# Altium PCB PCB1.PcbDoc
Units mm, origin at the board's own origin, x right, y up, seen from the top; angles counter-clockwise.
Board outline 56.39 x 66.29 mm, 2 copper layers (Top Layer, Bottom Layer); 16 components, 6 nets, 100 pads, 0 vias.
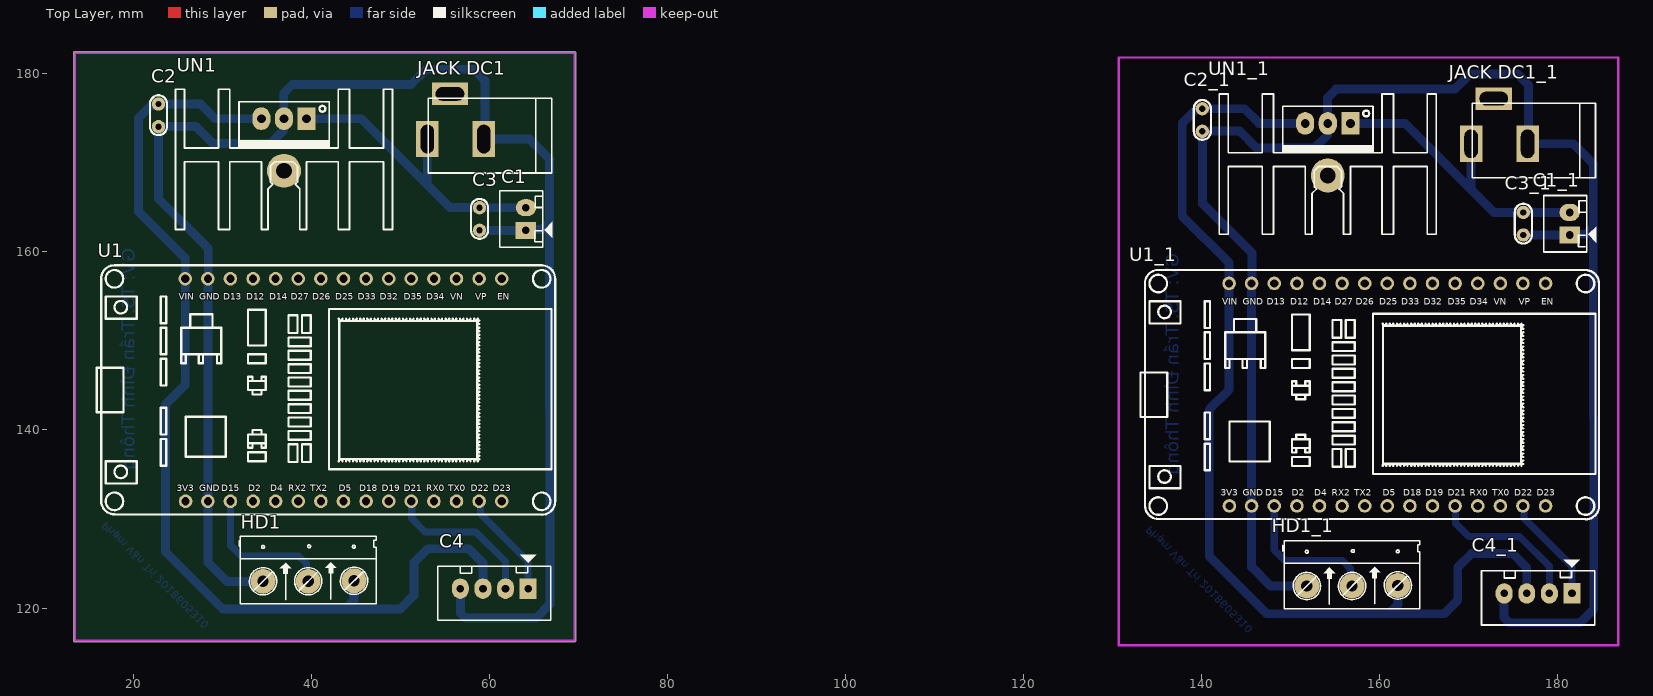
[diagram p0: Top Layer view]
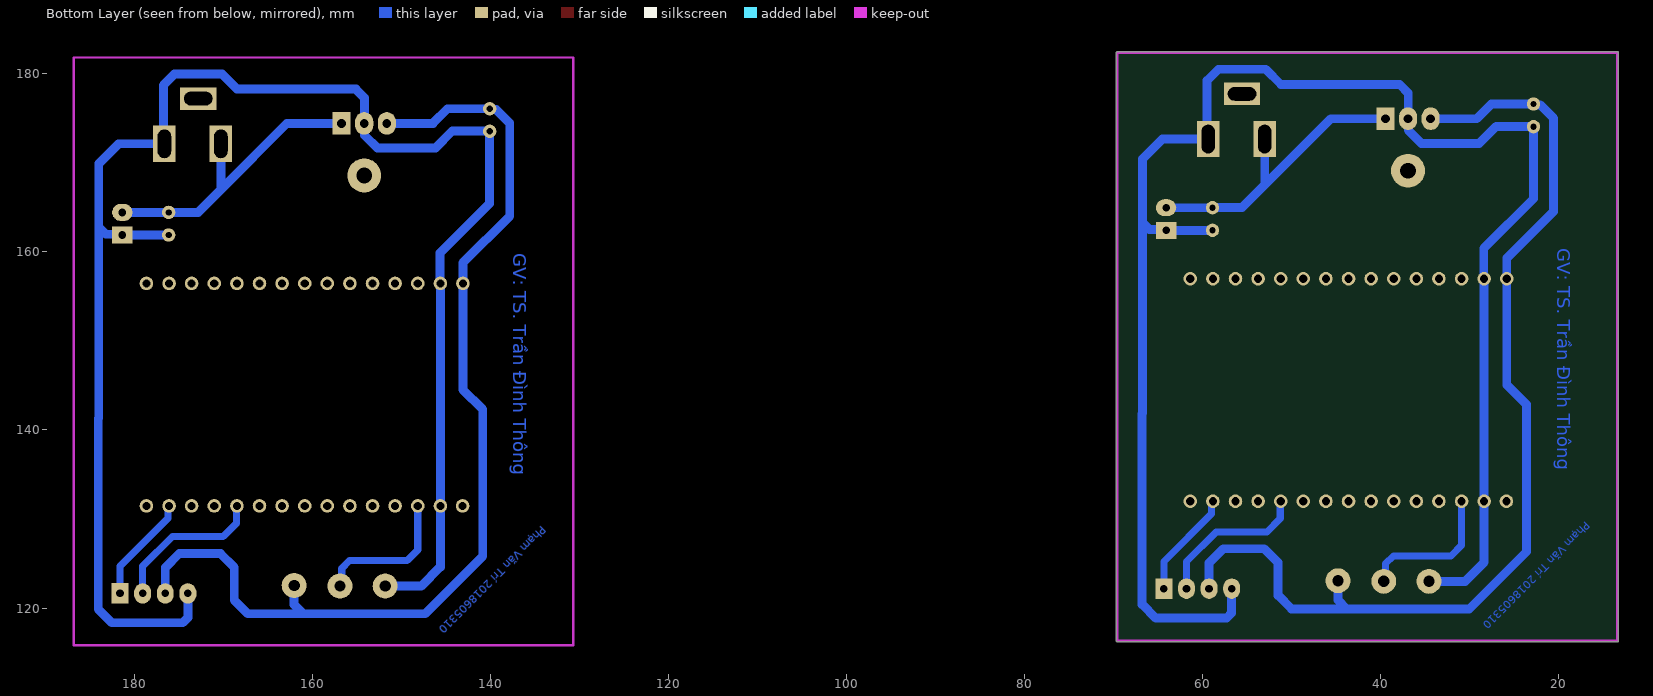
[diagram p1: Bottom Layer view, seen from below]

## Layer stack, top to bottom
Top Solder: solder mask 0.0102, Solder Resist, Dk 3.5
Top Layer: signal copper 0.0356
Dielectric 1: dielectric 0.32, FR-4, Dk 4.8
Bottom Layer: signal copper 0.0356
Bottom Solder: solder mask 0.0102, Solder Resist, Dk 3.5

## Board outline
13.462,116.205 cw(c13.462,116.332) 13.335,116.332 13.335,182.372 cw(c13.462,182.372) 13.462,182.5 69.596,182.5 cw(c69.596,182.372) 69.724,182.372 69.724,116.332 cw(c69.596,116.332) 69.596,116.205

## Design rules (kind name [scope] priority, off if disabled: settings)
Clearance [All] p1: gap=1 ignorepadtopadclearanceinfootprint=FALSE
PolygonConnect [All] p1: connectstyle=Relief reliefconductorwidth=0.254 reliefentries=4 polygonreliefangle="90 Angle" airgapwidth=0.254
RoutingVias [All] p1: holewidth=0.711 width=1.27 viastyle="Through Hole" minholewidth=0.711 minwidth=1.27 maxholewidth=0.711 maxwidth=1.27
SolderMaskExpansion [All] p1: expansion=0.102 istentingtop=FALSE
Width VCC5 [InNet('VCC5')] p1: maxlimit=1 minlimit=1 preferedwidth=1
Width VCC_IN [InNet('VCC_IN')] p2: maxlimit=1 minlimit=1 preferedwidth=1
Width VCC33 [InNet('VCC5')] p3: maxlimit=1 minlimit=1 preferedwidth=1
Width GND [InNet('GND')] p4: maxlimit=1 minlimit=1 preferedwidth=1
Width [All] p5: maxlimit=0.8 minlimit=0.8 preferedwidth=0.8
30 further rules are at their usual default settings.

## Classes and differential pairs
component class Sheet1: C1 C2 C3 C4 HD1 "JACK DC1" U1 UN1

## Components (designator, comment, footprint, x,y, rotation, side; value= is the part's Value field where it differs from the comment)
C1 "Header2" Header2 64.135,162.432 r90 top
C1_1 "Header2" Header2 181.405,161.902 r90 top (schematic designator C1)
C2 "104" "tu gom" 22.86,175.349 r270 top
C2_1 "104" "tu gom" 140.13,174.82 r270 top (schematic designator C2)
C3 "104" "tu gom" 58.928,163.703 r270 top
C3_1 "104" "tu gom" 176.198,163.174 r270 top (schematic designator C3)
C4 "LCD_I2C" Header4 64.389,122.174 r180 top
C4_1 "LCD_I2C" Header4 181.659,121.645 r180 top (schematic designator C4)
HD1 "Header 3" HED3 34.605,122.997 r0 top
HD1_1 "Header 3" HED3 151.874,122.468 r0 top (schematic designator HD1)
"JACK DC1" "JACK DC 5.5" "JACK DC 5.5" 56.236,175.222 r180 top value="Jac DC"
"JACK DC1_1" "JACK DC 5.5" "JACK DC 5.5" 173.506,174.693 r180 top value="Jac DC" (schematic designator "JACK DC1")
U1 "ESP32_MODULE copy" ESP32-WIFIMODULE-FOOTPRINT 41.91,142.367 r270 top
U1_1 "ESP32_MODULE copy" ESP32-WIFIMODULE-FOOTPRINT 159.18,141.838 r270 top (schematic designator U1)
UN1 "L78M05CP" QTO-220H2 36.957,174.968 r180 top
UN1_1 "L78M05CP" QTO-220H2 154.227,174.439 r180 top (schematic designator UN1)

## Footprints (in the part's own frame and the unit in brackets; to place one, negate y for a bottom-side part, rotate by r counter-clockwise, add the part's x,y. Pads: shape width x height; smd on the part's side, far side on the other; paste and mask are expansions set on the pad)
ESP32-WIFIMODULE-FOOTPRINT [mil]
  round 60 hole 36: 1(-575.9,768.25) 2(-575.9,668.25) 3(-575.9,568.25) 4(-575.9,468.25) 5(-575.9,368.25) 6(-575.9,268.25) 7(-575.9,168.25) 8(-575.9,68.25) 9(-575.9,-31.75) 10(-575.9,-131.75) 11(-575.9,-231.75) 12(-575.9,-331.75) 13(-575.9,-431.75) 14(-575.9,-531.75) 15(-575.9,-631.75) 16(408.35,-630.18) 17(408.35,-531.75) 18(408.35,-431.75) 19(408.35,-331.75) 20(408.35,-231.75) 21(408.35,-131.75) 22(408.35,-31.75) 23(408.35,68.25) 24(408.35,168.25) 25(408.35,268.25) 26(408.35,368.25) 27(408.35,468.25) 28(408.35,568.25) 29(408.35,668.25) 30(408.35,768.25)
  silkscreen extent -635,-1023 468,1005
Header2 [mil] "CON2"
  rect 75x90 hole 34: 1(0,0)
  oval 75x90 hole 34: 2(100,0)
  silkscreen extent -75,-118 175,115, body extent -68,-70 168,107, height 236
Header4 [mil] "CON4"
  rect 75x90 hole 34: 1(0,0)
  oval 75x90 hole 34: 2(100,0) 3(200,0) 4(300,0)
  silkscreen extent -100,-150 400,140, body extent -90,-90 398,136, height 276
HED3 [mil] "Header 3, 3 pin, hight 300mil, Pin to Pin 200, Colour Green"
  round 110 hole 50: 1(0,0) 2(200,0) 3(402.62,2.62)
  silkscreen extent -106,-100 500,200
"JACK DC 5.5" [mm] "Jac DC input"
  rect 2.54x4.064 hole 1.5 slot 3.2 at 90 deg: 1(3.175,2.54) 2(-3.175,2.54)
  rect 4.064x2.54 hole 1.5 slot 3.2 at 0 deg: 3(0.635,-2.54)
  silkscreen extent -10.8,-2.03 3.05,6.35, body extent -10.42,-2.67 3.4,6.84, height 11.02
QTO-220H2 [mil] "TO-220 - 1-2-3"
  round 150 hole 70: 0(0,230)
  rect 80x100 hole 39: 1(-100,0)
  oval 80x100 hole 39: 2(0,0) 3(100,0)
  silkscreen extent -480,-130 480,490, body extent -449,-177 453,469, height 1206
"tu gom" [mm] "Tu gom mini"
  round 1.5 hole 0.7: 1(-1.27,0) 2(1.27,0)
  silkscreen extent -2.25,-0.97 2.22,0.97, body extent -2.92,-0.85 2.92,0.85, height 6.12

## Part data
C1 C1_1: "Header IDC, 2 x 1 Pin Vertical 2.54mm Pitch (Non-Boxed, Male)", Manufacturer="W¨¹rth Elektronik eiSos GmbH", partNo=613002143121, ComponentLink1 Description=Manufacturer, ComponentLink1URL=http://www.we-online.com, ComponentLink2 Description=Datasheet, ComponentLink2URL=http://katalog.we-online.de/em/datasheet/6130xx143121.pdf, Created by="Karrer Zheng", Created Date="29 March 2013", NoPins=02
C2 C2_1 C3 C3_1: library part "Tu gom 104 50V", "Cắm", Chung_Loai=Cắm, Don_Vi=Con, Ma_Hang=MH004761, So_Chan=2, Ten_Linh_Kien="Tụ gốm 104 100nF 50V"
C4 C4_1: library part Header4, "Header IDC, 4 x 1 Pin Vertical 2.54mm Pitch (Non-Boxed, Male)", Manufacturer="W¨¹rth Elektronik eiSos GmbH", partNo=613002143121, ComponentLink1 Description=Manufacturer, ComponentLink1URL=http://www.we-online.com, ComponentLink2 Description=Datasheet, ComponentLink2URL=http://katalog.we-online.de/em/datasheet/6130xx143121.pdf, Created by="Karrer Zheng", Created Date="29 March 2013", NoPins=02
HD1 HD1_1: library part Hed3, "Header 3 (Green)"
UN1 UN1_1: "Positive Voltage Regulator", ComponentLink1Description="Manufacturer Link", ComponentLink1URL=http://www.st.com/, ComponentLink2Description=Datasheet, ComponentLink2URL=http://www.st.com/stonline/products/literature/ds/2146/l78m05c.pdf, DatasheetVersion=Apr-1994, LatestRevisionDate=17-Jul-2002, LatestRevisionNote="Re-released for DXP Platform.", Note="Tab is connected to pin 3 (GND).", PackageDescription="TO, Thru-Hole, Vertical, Heatsink Mounted; 3 In-Line Leads; Pitch 2.54 mm; Pin sequence 1, 3, 2", PackageReference=ISOWATT220AB, PackageVersion=Jul-1998, Published=24-Aug-2001, Publisher="Altium Limited"

## Nets (pads, with @x,y where several pads share a name; then routed paths per layer and width w, separated by ;. In a path a pad name is that pad's centre, name@x,y a point inside that pad or via, vN(x,y) a via of type N, cw(c..) or ccw(c..) an arc to the next point about the centre after c; other vN are vias at no path point)
DATA_SS: HD1.2 U1.18 | length 16.4
  Bottom Layer w0.8: U1.18 30.944,127.044 32.131,125.857 38.608,125.857 39.48,124.985 39.48,123.202 HD1.2
GND: "JACK DC1.2" C1.1 C2.2 C3.2 C4.4 HD1.1 U1.14 U1.17 UN1.2 | length 189.1
  Bottom Layer w1: HD1.1 30.547,122.997 28.404,125.14 U1.17 U1.14 28.448,157.04 28.448,160.401 22.86,165.989 C2.2 22.898,174.117 27.051,174.117 28.97,172.198 35.46,172.198 36.933,173.672 36.933,174.944 UN1.2 36.933,174.992 36.933,177.85 37.9,178.816 51.232,178.816 52.948,180.532 58.254,180.532 59.523,179.263 59.523,172.794 59.411,172.682 64.554,172.682 66.778,170.458 66.778,163.298 ; C4.4 56.769,119.458 57.355,118.872 65.304,118.872 66.842,120.41 66.842,141.822 66.778,141.886 66.778,163.298 ; C3.2 C1.1@64.135,162.433 ; C1.1 64.223,162.519 65.999,162.519 66.778,163.298
SCL: C4.1 U1.29 | length 12.1
  Bottom Layer w0.8: U1.29 59.022,131.857 59.022,130.589 64.389,125.222 C4.1
SDA: C4.2 U1.26 | length 17.6
  Bottom Layer w0.8: U1.26 51.308,131.951 51.308,130.048 52.801,128.556 58.51,128.556 61.849,125.217 C4.2
VCC5: C2.1 C4.3 HD1.3 U1.15 UN1.3 | length 117.4
  Bottom Layer w1: UN1.3 29.248,174.968 27.597,176.619 C2.1 22.765,176.524 22.123,176.524 20.61,175.011 20.61,164.556 25.864,159.303 U1.15 25.864,145.067 23.642,142.845 23.642,126.346 30.099,119.888 43.815,119.888 ; HD1.3 44.831,120.904 43.815,119.888 ; C4.3 59.309,125.07 57.723,126.656 53.123,126.656 51.562,125.095 51.562,121.412 50.038,119.888 43.815,119.888
VCC_IN: "JACK DC1.1" C1.2 C3.1 UN1.1 | length 33.9
  Bottom Layer w1: UN1.1 45.631,174.968 53.061,167.539 ; 53.061,172.682 53.061,167.539 ; C3.1 55.626,164.973 53.061,167.539 ; C3.1 C1.2@64.135,164.973
pads on no net: "JACK DC1.3" "JACK DC1_1.1" "JACK DC1_1.2" "JACK DC1_1.3" C1_1.1 C1_1.2 C2_1.1 C2_1.2 C3_1.1 C3_1.2 C4_1.1 C4_1.2 C4_1.3 C4_1.4 HD1_1.1 HD1_1.2 HD1_1.3 U1.1 U1.2 U1.3 U1.4 U1.5 U1.6 U1.7 U1.8 U1.9 U1.10 U1.11 U1.12 U1.13 U1.16 U1.19 U1.20 U1.21 U1.22 U1.23 U1.24 U1.25 U1.27 U1.28 U1.30 U1_1.1 U1_1.2 U1_1.3 U1_1.4 U1_1.5 U1_1.6 U1_1.7 U1_1.8 U1_1.9 U1_1.10 U1_1.11 U1_1.12 U1_1.13 U1_1.14 U1_1.15 U1_1.16 U1_1.17 U1_1.18 U1_1.19 U1_1.20 U1_1.21 U1_1.22 U1_1.23 U1_1.24 U1_1.25 U1_1.26 U1_1.27 U1_1.28 U1_1.29 U1_1.30 UN1.0 UN1_1.0 UN1_1.1 UN1_1.2 UN1_1.3
copper on no net: | length 386.5
  Bottom Layer w0.8: 148.213,131.466 148.213,126.515 149.4,125.328 155.877,125.328 156.749,124.456 156.749,122.673 156.954,122.468 ; 168.533,131.466 168.578,131.422 168.578,129.519 170.07,128.027 175.78,128.027 179.119,124.687 179.119,121.645 ; 176.153,131.466 176.292,131.328 176.292,130.06 181.659,124.693 181.659,121.645
  Bottom Layer w1: 151.687,174.439 146.518,174.439 144.867,176.09 140.13,176.09 140.034,175.994 139.392,175.994 137.88,174.482 137.88,164.027 143.133,158.774 143.133,156.466 143.133,144.538 140.911,142.316 140.911,125.817 147.369,119.359 161.085,119.359 ; 151.874,122.468 147.816,122.468 145.673,124.611 145.673,131.466 145.673,156.466 145.718,156.511 145.718,159.872 140.13,165.46 140.13,173.55 140.168,173.588 144.321,173.588 146.24,171.669 152.729,171.669 154.203,173.143 154.203,174.415 154.227,174.439 154.203,174.463 154.203,177.32 155.17,178.287 168.501,178.287 170.217,180.003 175.524,180.003 176.793,178.734 176.793,172.265 176.681,172.153 181.824,172.153 184.048,169.929 184.048,162.769 ; 156.767,174.439 162.901,174.439 170.331,167.009 ; 162.101,122.534 162.101,120.375 161.085,119.359 ; 170.331,172.153 170.331,167.009 ; 174.039,121.645 174.039,118.929 174.625,118.343 182.574,118.343 184.111,119.881 184.111,141.293 184.048,141.357 184.048,162.769 ; 176.199,161.903 181.404,161.903 ; 176.199,164.443 181.404,164.443 ; 176.198,164.444 172.896,164.444 170.331,167.009 ; 176.579,121.645 176.579,124.54 174.993,126.127 170.392,126.127 168.832,124.566 168.832,120.883 167.308,119.359 161.085,119.359 ; 181.405,161.902 181.492,161.99 183.269,161.99 184.048,162.769

## Keep-outs
Keep-Out Layer:
  lines w0.254: 13.462,116.332 13.462,182.372 14.351,182.372 69.596,182.372 69.596,117.856 69.596,116.332 13.462,116.332 ; 130.732,115.803 186.866,115.803 186.866,117.327 186.866,181.843 131.621,181.843 130.732,181.843 130.732,115.803

## Other copper
Bottom Layer:
  text "GV: TS. Trần Đình Thông" at 20.701,160.401 h2.52 r90
  text "GV: TS. Trần Đình Thông" at 137.971,159.872 h2.52 r90
  text "Phạm Văn Trí 2018605310" at 17.272,130.048 h1.52 r135
  text "Phạm Văn Trí 2018605310" at 134.542,129.519 h1.52 r135

## Text inside footprints (layer, text, board x,y; h text height)
U1: Top Overlay "VIN" at 25.124,154.62 h0.75; Top Overlay "GND" at 27.424,154.62 h0.75; Top Overlay "D13" at 30.124,154.62 h0.75; Top Overlay "D12" at 32.724,154.62 h0.75; Top Overlay "D14" at 35.324,154.62 h0.75; Top Overlay "D27" at 37.724,154.62 h0.75; Top Overlay "D26" at 40.124,154.62 h0.75; Top Overlay "D25" at 42.724,154.62 h0.75; Top Overlay "D33" at 45.224,154.62 h0.75; Top Overlay "D32" at 47.724,154.62 h0.75; Top Overlay "D35" at 50.424,154.62 h0.75; Top Overlay "D34" at 52.924,154.62 h0.75; Top Overlay "VN" at 55.624,154.62 h0.75; Top Overlay "VP" at 58.424,154.62 h0.75; Top Overlay "EN" at 60.924,154.62 h0.75; Top Overlay "3V3" at 24.924,133.12 h0.75; Top Overlay "GND" at 27.424,133.12 h0.75; Top Overlay "D15" at 29.924,133.12 h0.75; Top Overlay "D2" at 32.924,133.12 h0.75; Top Overlay "D4" at 35.424,133.12 h0.75; Top Overlay "RX2" at 37.424,133.12 h0.75; Top Overlay "TX2" at 39.924,133.12 h0.75; Top Overlay "D5" at 43.124,133.12 h0.75; Top Overlay "D18" at 45.424,133.12 h0.75; Top Overlay "D19" at 47.924,133.12 h0.75; Top Overlay "D21" at 50.424,133.12 h0.75; Top Overlay "RX0" at 52.924,133.12 h0.75; Top Overlay "TX0" at 55.424,133.12 h0.75; Top Overlay "D22" at 57.924,133.12 h0.75; Top Overlay "D23" at 60.424,133.12 h0.75
U1_1: Top Overlay "D23" at 177.694,132.591 h0.75; Top Overlay "D22" at 175.193,132.591 h0.75; Top Overlay "TX0" at 172.694,132.591 h0.75; Top Overlay "RX0" at 170.193,132.591 h0.75; Top Overlay "D21" at 167.694,132.591 h0.75; Top Overlay "D19" at 165.193,132.591 h0.75; Top Overlay "D18" at 162.693,132.591 h0.75; Top Overlay "D5" at 160.393,132.591 h0.75; Top Overlay "TX2" at 157.193,132.591 h0.75; Top Overlay "RX2" at 154.693,132.591 h0.75; Top Overlay "D4" at 152.693,132.591 h0.75; Top Overlay "D2" at 150.193,132.591 h0.75; Top Overlay "D15" at 147.193,132.591 h0.75; Top Overlay "GND" at 144.693,132.591 h0.75; Top Overlay "3V3" at 142.194,132.591 h0.75; Top Overlay "EN" at 178.193,154.091 h0.75; Top Overlay "VP" at 175.694,154.091 h0.75; Top Overlay "VN" at 172.893,154.091 h0.75; Top Overlay "D34" at 170.193,154.091 h0.75; Top Overlay "D35" at 167.694,154.091 h0.75; Top Overlay "D32" at 164.994,154.091 h0.75; Top Overlay "D33" at 162.493,154.091 h0.75; Top Overlay "D25" at 159.994,154.091 h0.75; Top Overlay "D26" at 157.393,154.091 h0.75; Top Overlay "D27" at 154.994,154.091 h0.75; Top Overlay "D14" at 152.594,154.091 h0.75; Top Overlay "D12" at 149.993,154.091 h0.75; Top Overlay "D13" at 147.393,154.091 h0.75; Top Overlay "GND" at 144.693,154.091 h0.75; Top Overlay "VIN" at 142.393,154.091 h0.75